# Altium PCB Test_2.PcbDoc
Units mm, origin at the board's own origin, x right, y up, seen from the top; angles counter-clockwise.
Board outline 100.2 x 50.04 mm, 2 copper layers (Top Layer, Bottom Layer); 21 components, 17 nets, 84 pads, 2 vias.
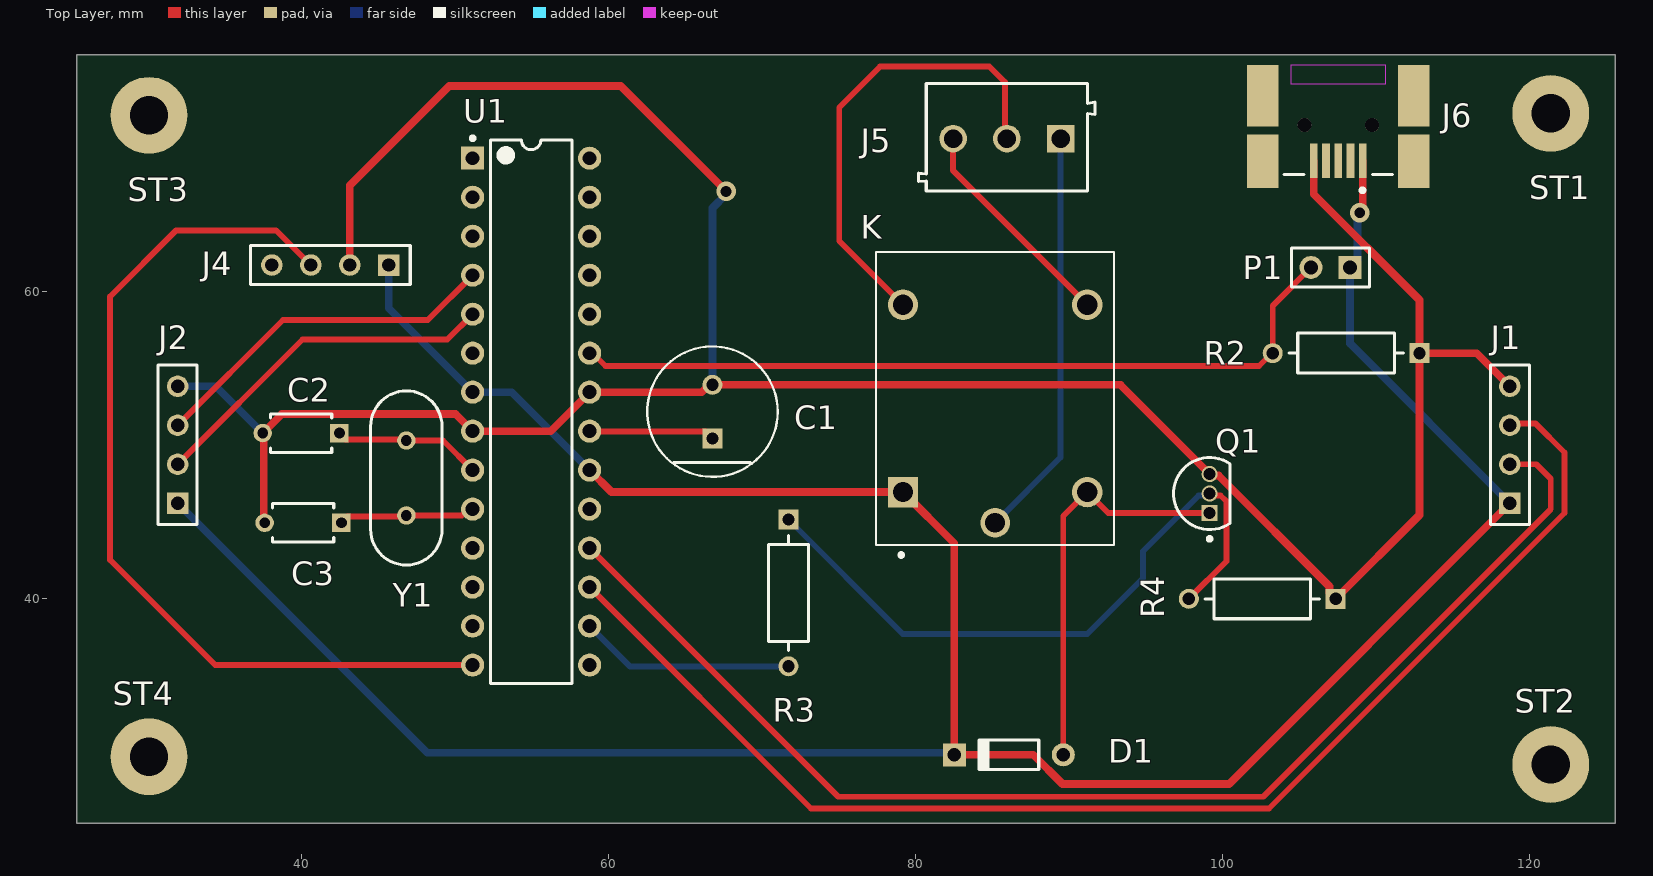
[diagram p0: Top Layer view]
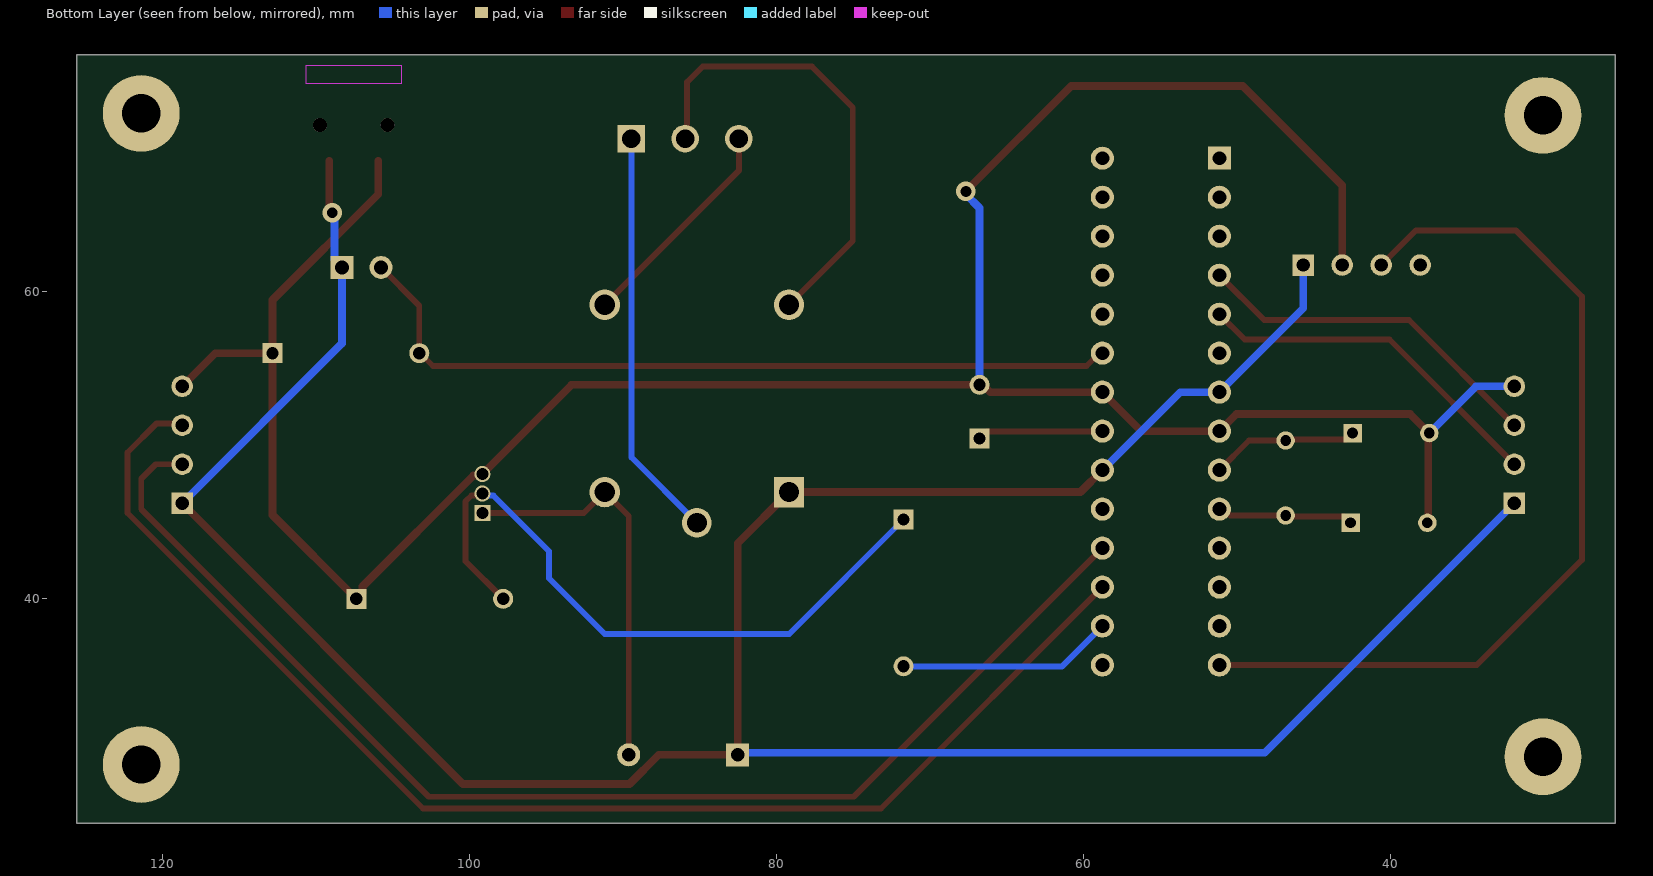
[diagram p1: Bottom Layer view, seen from below]
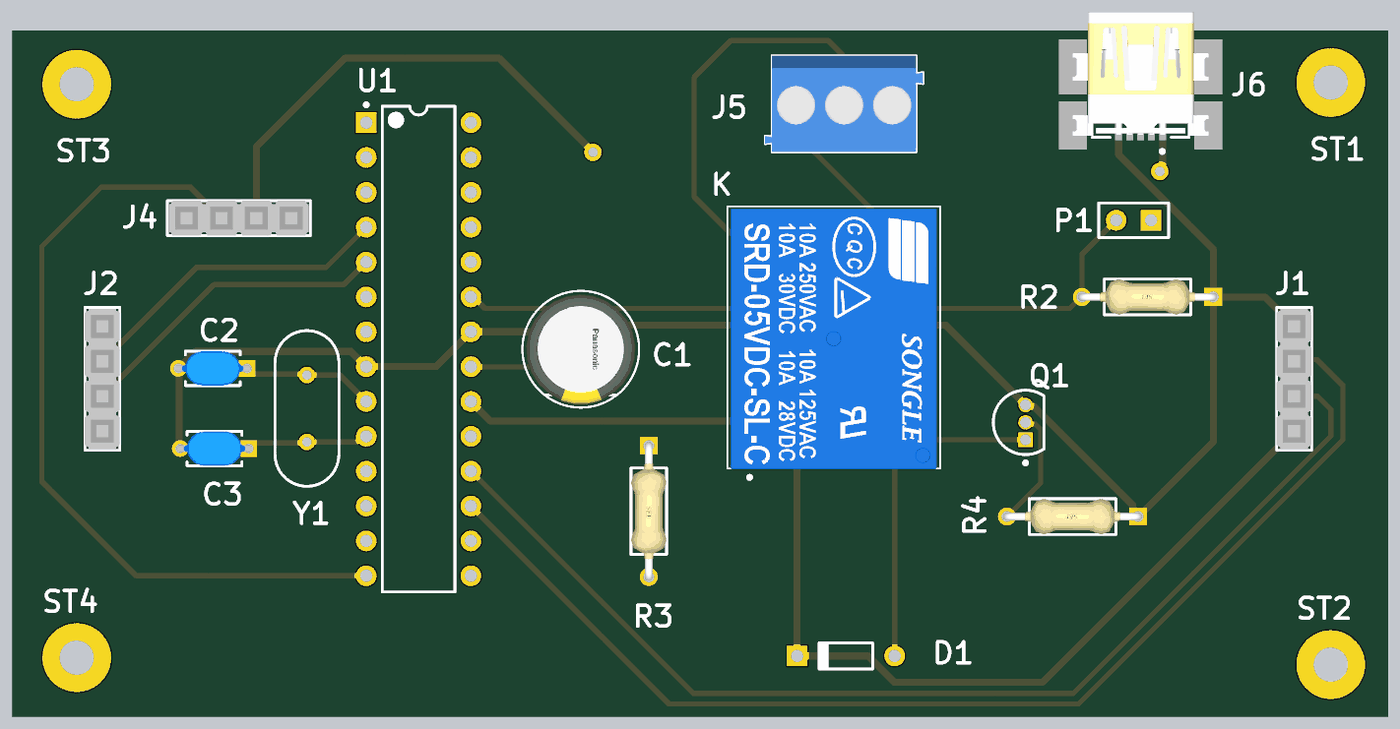
[diagram p2: 3D render of the assembled board from above, using the file's embedded part models]

## Layer stack, top to bottom
Top Solder: solder mask 0.0102, Solder Resist, Dk 3.5
Top Layer: signal copper 0.0356
Dielectric 1: dielectric 0.32, FR-4, Dk 4.8
Bottom Layer: signal copper 0.0356
Bottom Solder: solder mask 0.0102, Solder Resist, Dk 3.5

## Board outline
25.4,25.4 125.603,25.4 125.603,75.438 25.4,75.438

## Design rules (kind name [scope] priority, off if disabled: settings)
AssemblyTestPointUsage [All] p1: valid=2
Clearance [All] p1: gap=0.381 ignorepadtopadclearanceinfootprint=FALSE except(0.254: Arc-SMDPad Track-SMDPad SMDPad-SMDPad)
FabricationTestPointUsage [All] p1: valid=2 allowmultiple=FALSE
PolygonConnect [All] p1: connectstyle=Relief reliefconductorwidth=0.254 reliefentries=4 polygonreliefangle="90 Angle" airgapwidth=0.254
RoutingVias [All] p1: holewidth=0.711 width=1.27 viastyle="Through Hole" minholewidth=0.711 minwidth=1.27 maxholewidth=0.711 maxwidth=1.27
SolderMaskExpansion [All] p1: expansion=0.102 istentingtop=FALSE
Width Width_1 [InNet('5V') or InNet('GND')] p1: maxlimit=0.635 minlimit=0.381 preferedwidth=0.508
Width [All] p2: maxlimit=0.508 minlimit=0.254 preferedwidth=0.381
28 further rules are at their usual default settings.

## Components (designator, comment, footprint, x,y, rotation, side; value= is the part's Value field where it differs from the comment)
C1 "100nF" FP-EEU-FC1V221L-MFG 66.802,52.197 r90 top
C2 "22pF" FP-RDE0M1-MFG 40.005,50.8 r180 top
C3 "22pF" FP-RDE0M1-MFG 40.132,44.958 r180 top
D1 "Diode 1N4148" DO-35 86.106,29.845 r180 top
J1 "SLW-104-01-T-S" SMTC-SLW-104-01-X-S 118.745,46.228 r90 top
J2 "SLW-104-01-T-S" SMTC-SLW-104-01-X-S 31.965,46.228 r90 top
J4 "SLW-104-01-T-S" SMTC-SLW-104-01-X-S 45.72,61.745 r180 top
J5 "691103110003" 691103110003 85.979,70.077 r180 top
J6 "678038020" FP-678038020-MFG 107.569,72.263 r270 top
K "SRD-05VDC-SL-C" RELAY_SRD-05VDC-SL-C 85.217,53.058 r90 top
P1 "Header 2" HDR1X2 108.331,61.595 r180 top
Q1 "BC 109" ONSC-TO-92-3-29-11 99.187,46.863 r90 top
R2 "10K" FP-CF14-MFG 108.077,56.007 r180 top
R3 "1K" FP-CF14-MFG 71.755,40.386 r270 top
R4 "1K" FP-CF14-MFG 102.616,40.005 r180 top
ST1 "PTH-M2D5X5" PTH-M2D5X5 121.412,71.628 r180 top
ST2 "PTH-M2D5X5" PTH-M2D5X5 121.412,29.21 r0 top
ST3 "PTH-M2D5X5" PTH-M2D5X5 30.099,71.501 r180 top
ST4 "PTH-M2D5X5" PTH-M2D5X5 30.099,29.718 r0 top
U1 "ATmega328P-PU" 28P3 54.991,52.197 r0 top
Y1 "FOXSLF/120-20" FOX-FOXSLF-2_V 46.863,47.879 r90 top

## Footprints (in the part's own frame and the unit in brackets; to place one, negate y for a bottom-side part, rotate by r counter-clockwise, add the part's x,y. Pads: shape width x height; smd on the part's side, far side on the other; paste and mask are expansions set on the pad)
28P3 [mm] "28-Pin Plastic Dual In-Line Package (PDIP)"
  rect 1.5x1.5 hole 0.9: 1(-3.81,16.51)
  round 1.5 hole 0.9: 2(-3.81,13.97) 3(-3.81,11.43) 4(-3.81,8.89) 5(-3.81,6.35) 6(-3.81,3.81) 7(-3.81,1.27) 8(-3.81,-1.27) 9(-3.81,-3.81) 10(-3.81,-6.35) 11(-3.81,-8.89) 12(-3.81,-11.43) 13(-3.81,-13.97) 14(-3.81,-16.51) 15(3.81,-16.51) 16(3.81,-13.97) 17(3.81,-11.43) 18(3.81,-8.89) 19(3.81,-6.35) 20(3.81,-3.81) 21(3.81,-1.27) 22(3.81,1.27) 23(3.81,3.81) 24(3.81,6.35) 25(3.81,8.89) 26(3.81,11.43) 27(3.81,13.97) 28(3.81,16.51)
  silkscreen extent -3.93,-17.7 2.65,17.93, body extent -3.6,-17.65 3.6,17.65, height 4.58
691103110003 [mm] "3,50mm - modular - blue - Horizontal wire entry - Pressure clamp - 8,4mm height - 03p"
  rect 1.8x1.8 hole 1.2: 1(-3.5,0.1)
  round 1.8 hole 1.2: 2(0,0.1) 3(3.5,0.1)
  silkscreen extent -5.75,-3.5 5.75,3.5, body extent -5.75,-3.5 5.75,3.5, height 8.45
DO-35 [mm] "Diode, Axial; Body 3.8 x 1.9 mm (LxDia. max), Lead Dia. 0.53 mm (max)"
  round 1.5 hole 0.9: 1(-3.55,0)
  rect 1.5x1.5 hole 0.9: 2(3.55,0)
  silkscreen extent -1.95,-0.95 2.05,0.95
FOX-FOXSLF-2_V [mm] "THD, 2-Leads, Body 11.35x4.65mm, Pitch 4.88mm"
  round 1.2 hole 0.7: 1(-2.44,0) 2(2.44,0)
  silkscreen extent -5.68,-2.32 5.68,2.32, body extent -5.67,-2.32 5.68,2.32, height 3.6
FP-678038020-MFG [mm]
  rect 2.25x0.5 smd paste+0 mask+0: 1(3.725,1.6) 2(3.725,0.8) 3(3.725,0) 4(3.725,-0.8) 5(3.725,-1.6)
  rect 4x2.05 smd paste+0 mask+0: 6(-0.5,4.925) 8(-0.5,-4.925)
  rect 3.5x2.05 smd paste+0 mask+0: 7(3.75,4.925) 9(3.75,-4.925)
  round 0.9 hole 0.9 unplated paste-1000 mask+0: ""(1.4,2.2) ""(1.4,-2.2)
  Keep-Out Layer region: -2.5,-3.1 -1.3,-3.1 -1.3,3.1 -2.5,3.1
  silkscreen extent 4.62,-3.52 5.77,3.52, body extent -4.72,-6.05 5.6,6.05, height 0.25
FP-CF14-MFG [mm]
  rect 1.3x1.3 hole 0.8 paste-1000 mask+0: 1(-4.78,0)
  round 1.3 hole 0.8 paste-1000 mask+0: 2(4.78,0)
  silkscreen extent -3.73,-1.3 3.73,1.3, body extent -5.53,-1.4 5.53,1.4, height 0.25
FP-EEU-FC1V221L-MFG [mm]
  rect 1.3x1.3 hole 0.8 paste-1000 mask+0: 1(-1.75,0)
  round 1.3 hole 0.8 paste-1000 mask+0: 2(1.75,0)
  silkscreen extent -4.25,-4.25 4.25,4.25, body extent -4.35,-4.35 4.35,4.35, height 0.25
FP-RDE0M1-MFG [mm]
  rect 1.2x1.2 hole 0.7 paste-1000 mask+0: 1(-2.5,0)
  round 1.2 hole 0.7 paste-1000 mask+0: 2(2.5,0)
  silkscreen extent -2,-1.25 2,1.25, body extent -3.2,-1.35 3.2,1.35, height 0.25
HDR1X2 [mm] "Connector; Header; 2 Position"
  rect 1.5x1.5 hole 0.9: 1(0,0)
  round 1.5 hole 0.9: 2(2.54,0)
  silkscreen extent -1.27,-1.27 3.81,1.27
ONSC-TO-92-3-29-11 [mm] "TO, 3-Leads, Body Dia 4.7mm, Pitch 1.27mm"
  rect 1.05x1.05 hole 0.8: 1(-1.27,0)
  round 1.05 hole 0.8: 2(0,0) 3(1.27,0)
  silkscreen extent -3.07,-1.34 2.35,2.35, body extent -2.35,-1.33 2.36,2.36, height 7.87
PTH-M2D5X5 [mm]
  round 5 hole 2.5: 1(0,0)
RELAY_SRD-05VDC-SL-C [mm]
  rect 1.98x1.98 hole 1.32: A1(-6.1,6)
  round 1.98 hole 1.32: A2(-6.1,-6) NC(6.1,6) NO(6.1,-6)
  round 1.935 hole 1.29: COM(-8.1,0)
  silkscreen extent -10.3,-7.75 9.55,7.75, body extent -9.6,-7.5 9.4,7.5, height 16.15
SMTC-SLW-104-01-X-S [mm] "Low Profile Socket Strip, 1x4 Pins, Vertical, 2.54mm Pitch, Female"
  rect 1.4x1.4 hole 0.86: 1(0,0)
  round 1.4 hole 0.86: 2(2.54,0) 3(5.08,0) 4(7.62,0)
  silkscreen extent -1.4,-1.27 9.02,1.27, body extent -1.27,-1.27 8.89,1.27, height 4.57

## Part data
C1: library part CMP-05427-000010-1, "CAP ALUM 220UF 20% 35V RADIAL", Leakage Current=77uA, Manufacturer="Panasonic Electronic Components", Manufacturer Part Number=EEU-FC1V221L, Package=0, Ripple Current=730mA, Temperature="-55°C to +105°C", Temperature Range High=+105°C, Temperature Range Low=-55°C, Tolerance=20%, Voltage Rating=35V, Automotive=Yes, Automotive Grade="Grade 2", Capacitance=100nF, Category=Cap, ComponentLink2Description=Datasheet, ComponentLink2URL=https://industrial.panasonic.com/cdbs/www-data/pdf/RDF0000/ABA0000C1209.pdf, Device Class L1="Passive Components", Device Class L2=Capacitors, Device Class L3="Aluminum Electrolytic Capacitors", Digikey Description="CAP ALUM 220UF 20% 35V RADIAL", Dissipation Factor=12%, Esr=0.085Ω, Height=16.5mm, Lead Free=Yes, Life=2000Hours, Material=Aluminum, Mouser Description="Capacitor; Aluminum Electrolytic; Fc Radial Elec Cap 220uF 35V", Octopart=https://octopart.com/eeu-fc1v221l-panasonic-39478519, RoHS=TRUE
C2 C3: library part CMP-06035-051680-1, "Ceramic Capacitor 100nF ±10% 50V X7R Radial", Case/Package=Radial, Dielectric=X7R, Max Operating Temperature=125°C, Min Operating Temperature=-55°C, Package Quantity=2000, Resistor Type=Ceramic, Tolerance=10%, Voltage Rating=50V, Capacitance=22pF, Height=3.5mm, Height - Seated (Max)=0.236inch, Lead Diameter=0.5mm, Lead Free="Lead Free", Lead Pitch=0.197inch, Lead/Base Style=Kinked, Length=0.157inch, Mount="Through Hole", Packaging="Tape and Reel", Termination=Radial, Voltage Rating (DC)=50V, Width=3.5mm
D1: "High Conductance Fast Diode", Code_JEDEC=DO-204-AH, ComponentLink1Description="Manufacturer Link", ComponentLink1URL=http://www.fairchildsemi.com/, ComponentLink2Description=Datasheet, ComponentLink2URL=http://www.fairchildsemi.com/ds/1N%2F1N4148.pdf, DatasheetVersion=1997, LatestRevisionDate=17-Jul-2002, LatestRevisionNote="Re-released for DXP Platform.", PackageDescription="Diode, Axial; Body 3.8 x 1.9 mm (LxDia. max), Lead Dia. 0.53 mm (max)", PackageReference=DO-35, Published=8-Jun-2000, Publisher="Altium Limited"
J1 J2 J4: library part CMP-1023-00131-1, "Low Profile Socket Strips, Through-hole, Vertical, -55 to 105 degC, 2.54 mm Pitch, 4-Pin, Female, RoHS", Manufacturer=Samtec, Temperature Range="-55 to 105 degC", ComponentLink1Description="Manufacturer URL", ComponentLink1URL=http://www.samtec.com, ComponentLink2Description=Datasheet, ComponentLink2URL=http://www.samtec.com/documents/webfiles/pdf/SLW.PDF, ComponentLink3Description="Package Specification", ComponentLink3URL=http://www.samtec.com/documents/webfiles/cpdf/SLW-1XX-01-X-X-MKT.pdf, DatasheetVersion=F-214, Mounting Technology=Through-hole, Orientation=Vertical, PackageDescription="Low Profile Socket Strip", PackageReference=SLW-104-01-X-S, PackageVersion="X, 9/1987", PartNumber=SLW-104-01-T-S, Pitch="2.54 mm", RoHS=True
J5: library part CMP-1502-03255-1, "Series 1031 - 3.50 mm Horizontal Entry Modular with Pressure Clamp WR-TBL, 3 pin", Manufacturer="Wurth Elektronik", Operating Temperature=-40to105degC, Datasheet URL=http://katalog.we-online.de/em/datasheet/6911031100xx.pdf, Manufacturer URL=http://www.we-online.de, Mounting Technology=THT, Package Reference=691103110003, Packaging=Box, Part Number=691103110003, Pin Number=3, Pitch=3.50mm, Publisher=WurthElektronik
J6: library part CMP-04767-000002-1, "CONN RCPT USB2.0 MINI AB SMD R/A", Ambient Temperature Range High=+50°C, Ambient Temperature Range Low=0°C, Current Rating=1A, Manufacturer=Molex, Package=0, Temperature="0°C to +50°C", Voltage Rating=30V, Automotive=No, Category=Conn, ComponentLink2Description=Datasheet, ComponentLink2URL=https://www.molex.com/webdocs/datasheets/pdf/en-us/0678038020_IO_CONNECTORS.pdf, Conn Orientation="Right Angle", Contact Material=Gold,Nickel, Device Class L1=Connectors, Device Class L2="USB Connectors", Device Class L3=unset, Digikey Description="CONN RCPT USB2.0 MINI AB SMD R/A", Footprint Url=https://www.molex.com/pdm_docs/sd/678038020_sd.pdf, Height=4.1mm, Is Female=yes, Lead Free=Yes, Manufacturer Part Number=678038020, Mouser Description="Conn Mini-USB Type AB RCP 5 POS 0.8mm Solder RA SMD 5 Terminal 1 Port Embossed T/R", Number Of Contacts=5, Octopart=https://octopart.com/67803-8020-molex-7136109, Pitch=0.8mm, RoHS=TRUE, Shielding=true, Temperature Range High=+50°C, Temperature Range Low=0°C, USB Standard="USB 2.0"
K: "5V Trigger Relay Module For Arduino And Raspberry Pi 5V Trigger Relay Module For Arduino And Raspberry Pi", Package=None, Availability=Unavailable, MF="Songle Relay", MP=SRD-05VDC-SL-C, Price=None, SnapEDA_Link=https://www.snapeda.com/parts/SRD-05VDC-SL-C/Songle%20Relay/view-part/1029484/?ref=snap
P1: "Header, 2-Pin", LatestRevisionDate=17-Jul-2002, LatestRevisionNote="Re-released for DXP Platform.", Publisher="Altium Limited"
Q1: library part CMP-1048-01461-1, "Low Noise Transistor, NPN Silicon, 3-Pin TO-92, Pb-Free, Bulk Box", Manufacturer="On Semiconductor", ComponentLink1Description="Manufacturer URL", ComponentLink1URL=http://www.onsemi.com/, ComponentLink2Description=Datasheet, ComponentLink2URL=http://www.onsemi.com/pub_link/Collateral/BC550C-D.PDF, ComponentLink3Description="Package Specification", ComponentLink3URL=http://www.onsemi.cn/pub_link/Collateral/2N6426-D.PDF, DatasheetVersion="Rev. 2", IC Continuous (A)=0.1, Mounting Technology="Through Hole", PackageDescription="3-Pin Transistor Outline, Body 4.825 x 3.685 mm, Pitch 1.27 mm", PackageReference=TO-92-3-29-11_AM_SL, PackageVersion="Rev. AM", Packing="Bulk Box", PartNumber="BC 109", Polarity=NPN, RoHS=TRUE
R2 R3 R4: library part CMP-26528-000003-1, "RES 7.5K OHM 1/4W 5% AXIAL", Case/Package=Axial, Max Operating Temperature=155°C, Max Power Dissipation=250mW, Min Operating Temperature=-55°C, Resistor Type="Carbon Film", Temperature Coefficient=-400ppm/°C, Tolerance=5%, Contact Plating=Tin, Diameter=2.3mm, Features="Flame Retardant Coating", Lead Free="Lead Free", Length=0.256inch, Mount="Through Hole", Number of Terminations=2, Packaging="Tape and Reel", Power Rating=250mW, Radiation Hardening=No, RoHS Compliant=Yes, Series=CF
  R2: Resistance=10K
  R3 R4: Resistance=1K
ST1 ST2 ST3 ST4: library part CMP-00028-00004-1, "M2 PTH (2.5mm), 5mm pad", Pins=1
U1: library part CMP-0095-00013-2, "8-bit AVR Microcontroller, 32KB Flash, 1KB EEPROM, 2KB SRAM, 28-pin PDIP, Industrial Grade (-40°C to 85°C)", ComponentLink1Description="Manufacturer URL", ComponentLink1URL=http://www.atmel.com/, ComponentLink2Description="ATmega48A/48PA/88A/88PA/168A/168PA/328/328P Datasheet", ComponentLink2URL=http://www.atmel.com/dyn/resources/prod_documents/8271.pdf, ComponentLink3Description="ATmega48A/48PA/88A/88PA/168A/168PA/328/328P Summary", ComponentLink3URL=http://www.atmel.com/dyn/resources/prod_documents/8271S.pdf, DatasheetVersion="revD, May-2011", PackageDescription="28-lead (0.300\"/7.62mm Wide) Plastic Dual Inline Package (PDIP)", PackageReference=28P3, PackageVersion="revB, Sep-2001", RevisionNote="DatasheetVersion updated. URLs added."
Y1: library part CMP-1749-00004-1, "Resistance Weld Thru-Hole Crystal, 12 MHz, +/-30 ppm, -20 to 70 degC, 2-Pin THD, RoHS, Bulk", Case\Package=TO-251-3, Input Capacitance="350 pF", Max Operating Temperature="150 degC", Max Power Dissipation="2.5 W", Min Operating Temperature="-55 degC", Package Quantity=70, ComponentLink1Description="Manufacturer URL", ComponentLink1URL=http://www.foxonline.com/, ComponentLink2Description=Datasheet, ComponentLink2URL=http://www.foxonline.com/pdfs/hc49slf.pdf, DatasheetVersion=Mar-15, Elements=1, Height="6.1 mm", Length="6.6 mm", Mount="Through Hole", PackageDescription="2-Pin Through Hole Device, Body 11.35 x 4.65 mm, Pitch 4.88 mm", PackageReference=FOXSLF-2, Packaging=Rail/Tube, Pins=3, Radiation Hardening=No, Rds On Max="115 mohm", REACH SVHC="No SVHC", RoHSCompliant=true, Typical Rise Time="90 ns", Width="2.3 mm"

## Via types
v1: diameter 1.27, hole 0.711, Top Layer to Bottom Layer, 2 vias

## Nets (pads, with @x,y where several pads share a name; then routed paths per layer and width w, separated by ;. In a path a pad name is that pad's centre, name@x,y a point inside that pad or via, vN(x,y) a via of type N, cw(c..) or ccw(c..) an arc to the next point about the centre after c; other vN are vias at no path point)
5V: D1.2 J1.1 J2.1 J4.1 J6.1 K.A1 P1.1 U1.7 U1.20 | length 188.9
  Top Layer w0.508: U1.20 60.23,46.958 K.A1 82.556,43.619 D1.2 87.697,29.845 89.602,27.94 100.457,27.94 J1.1 ; v1@109.113,65.298 v1(108.968,65.153) 108.968,65.359 109.169,65.56 J6.1
  Bottom Layer w0.508: J2.1 48.221,29.972 82.429,29.972 D1.2 ; J4.1 45.72,58.928 U1.7 53.721,53.467 U1.20 ; v1(108.968,65.153) 108.822,65.007 108.822,62.086 P1.1 108.331,56.642 J1.1
C: J5.1 K.COM | length 26.8
  Top Layer w0.381: J5.1 J5.1@89.505,69.951
  Bottom Layer w0.381: K.COM 89.479,49.22 J5.1
ECHO: J2.3 U1.4 | length 23.3
  Top Layer w0.381: J2.3 38.823,58.166 48.26,58.166 U1.4
ECHO1: J1.3 U1.17 | length 85.8
  Top Layer w0.381: U1.17 73.215,26.352 103.06,26.352 122.301,45.593 122.301,49.53 120.396,51.435 118.872,51.435 J1.3
GND: C1.2 C2.2 C3.2 J1.4 J2.4 J4.2 J6.5 Q1.3 R2.1 R4.1 U1.8 U1.22 | length 179.4
  Top Layer w0.508: C3.2 37.568,45.021 37.568,50.736 C2.2 38.74,52.035 50.073,52.035 U1.8 56.261,50.927 U1.22 66.108,53.467 66.588,53.947 C1.2 93.373,53.947 99.291,48.029 99.776,48.029 107,40.806 107,40.401 R4.1 112.857,45.466 R2.1 ; J4.2 43.18,66.929 49.657,73.406 60.833,73.406 v1(67.691,66.548) ; J6.5 105.969,66.355 112.857,59.467 R2.1 ; J1.4 116.586,56.007 R2.1
  Bottom Layer w0.508: J2.4 34.457,53.848 C2.2 ; C1.2 66.802,65.461 67.691,66.35 v1(67.691,66.548)
IR: J4.3 U1.14 | length 59.4
  Top Layer w0.381: J4.3 38.377,64.008 31.877,64.008 27.559,59.69 27.559,42.545 34.417,35.687 U1.14
LDR: P1.2 R2.2 U1.23 | length 51.8
  Top Layer w0.381: U1.23 58.993,56.007 59.831,55.169 102.408,55.169 103.247,56.007 R2.2 103.297,59.101 P1.2
NC: J5.2 K.NC | length 30.6
  Top Layer w0.381: K.NC 75.057,63.318 75.057,72.009 77.724,74.676 84.836,74.676 85.852,73.66 85.852,70.104 J5.2
NetC1_1: C1.1 U1.21 | length 8.2
  Top Layer w0.381: U1.21 58.821,50.907 66.342,50.907 C1.1
NetC2_1: C2.1 U1.9 Y1.2 | length 9.5
  Top Layer w0.381: C2.1 42.915,50.39 46.792,50.39 Y1.2 ; Y1.2@47.081,50.319 49.249,50.319 U1.9
NetC3_1: C3.1 U1.10 Y1.1 | length 8.9
  Top Layer w0.381: C3.1 43.042,45.368 46.791,45.368 Y1.1 50.47,45.439 50.878,45.847 U1.10
NetD1_1: D1.1 K.A2 Q1.1 | length 26.4
  Top Layer w0.381: D1.1@89.58,29.921 D1.1 89.656,45.397 K.A2 92.582,45.593 Q1.1
NetQ1_2: Q1.2 R3.1 R4.2 | length 44.5
  Top Layer w0.381: R3.1 R3.1@72.09,44.831 ; R4.2 100.284,42.453 100.284,46.355 99.903,46.735 99.315,46.735 Q1.2
  Bottom Layer w0.381: R3.1 79.202,37.719 91.217,37.719 94.844,41.346 94.844,43.108 98.471,46.735 99.059,46.735 Q1.2
NO: J5.3 K.NO | length 14.4
  Top Layer w0.381: J5.3 82.479,67.896 K.NO
Relay: R3.2 U1.16 | length 14
  Bottom Layer w0.381: U1.16 61.422,35.606 R3.2
TRIG: J2.2 U1.5 | length 23.3
  Top Layer w0.381: J2.2 40.093,56.896 49.53,56.896 U1.5
TRIG1: J1.2 U1.18 | length 82.1
  Top Layer w0.381: U1.18 74.993,27.114 102.679,27.114 121.412,45.847 121.412,47.825 120.469,48.768 J1.2
pads on no net: J4.4 J6. J6.2 J6.3 J6.4 J6.6 J6.7 J6.8 J6.9 ST1.1 ST2.1 ST3.1 ST4.1 U1.1 U1.2 U1.3 U1.6 U1.11 U1.12 U1.13 U1.15 U1.19 U1.24 U1.25 U1.26 U1.27 U1.28

## Silkscreen, mask and mechanical layers (free items; w line width, h text height)
Top Outline:
  lines w0.125: 25.4,25.4 25.4,75.438 125.603,75.438 125.603,25.4 25.4,25.4
  lines w0.254: 25.4,25.4 25.4,75.438 125.603,75.438 ; 25.4,25.4 25.4,25.4 ; 25.4,25.4 125.603,25.4 125.603,75.438 ; 125.603,75.438 125.603,75.438
Bottom Outline (Mech7):
  the board outline again, w0.254